# Altium PCB PCB1.PcbDoc
Units mm, origin at the board's own origin, x right, y up, seen from the top; angles counter-clockwise.
Board outline 85 x 55 mm, 2 copper layers (Top Layer, Bottom Layer); 4 components, 7 nets, 51 pads, 0 vias.
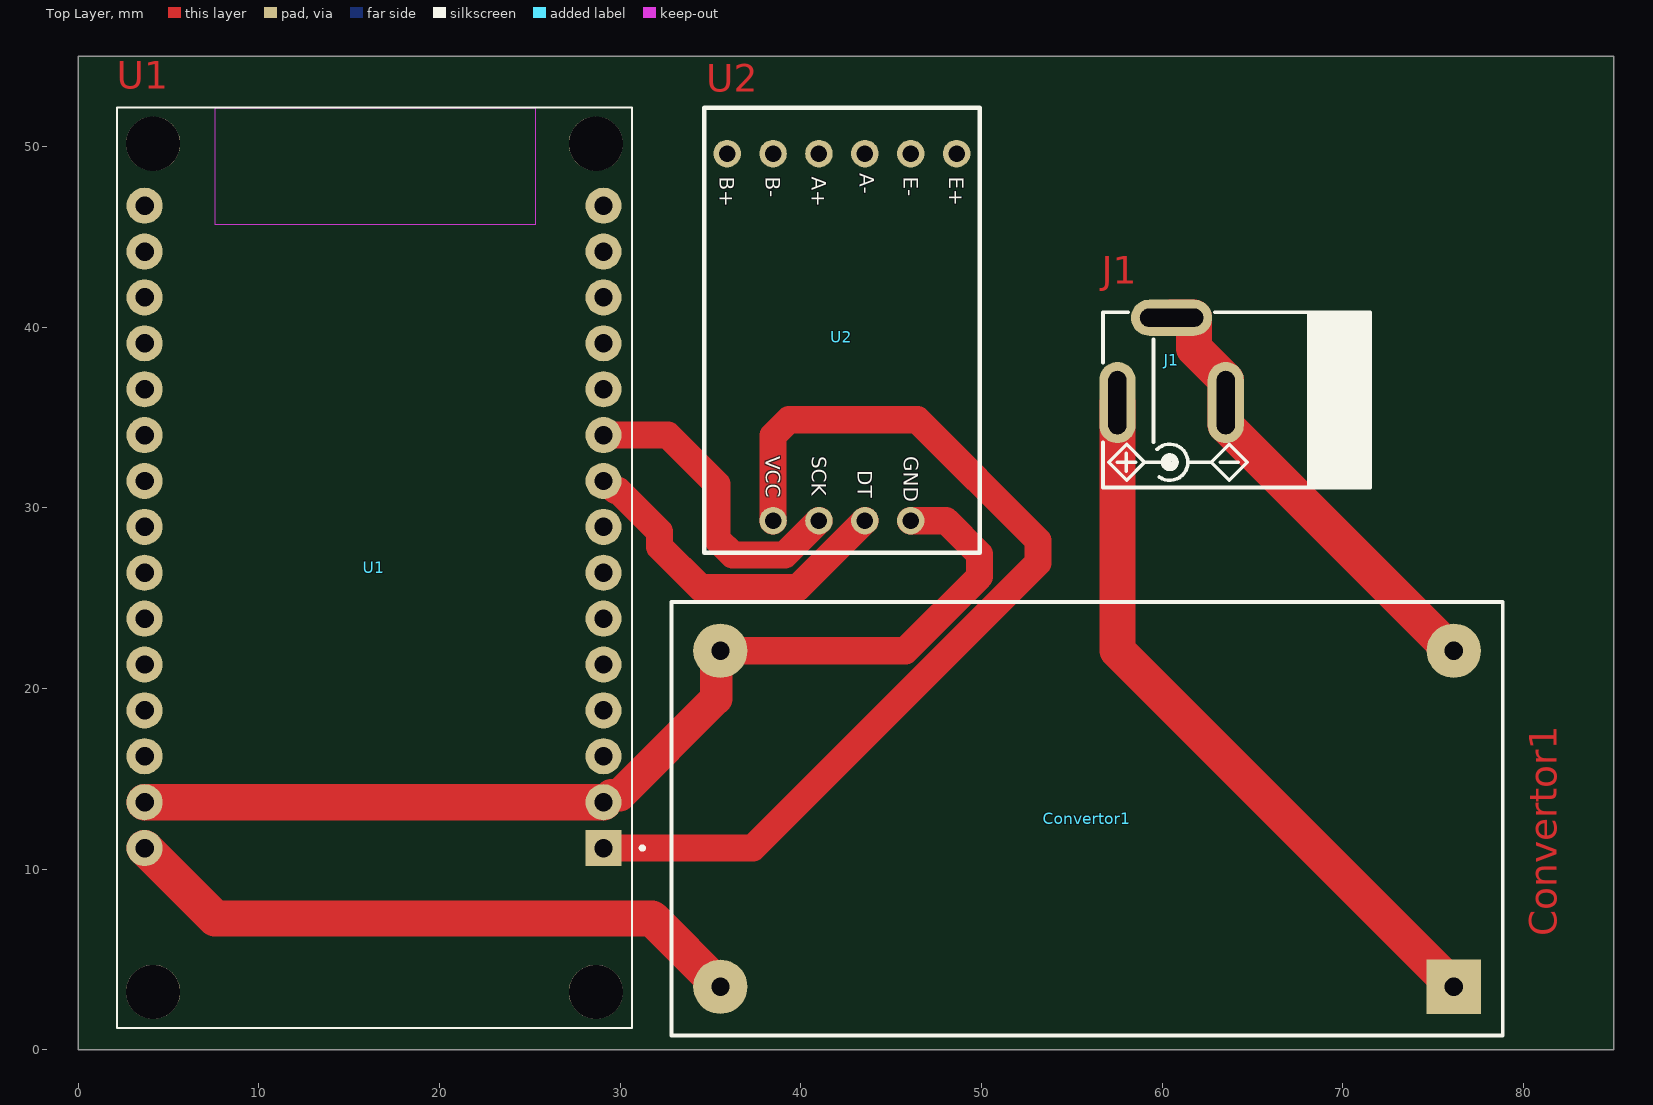
[diagram p0: Top Layer view]
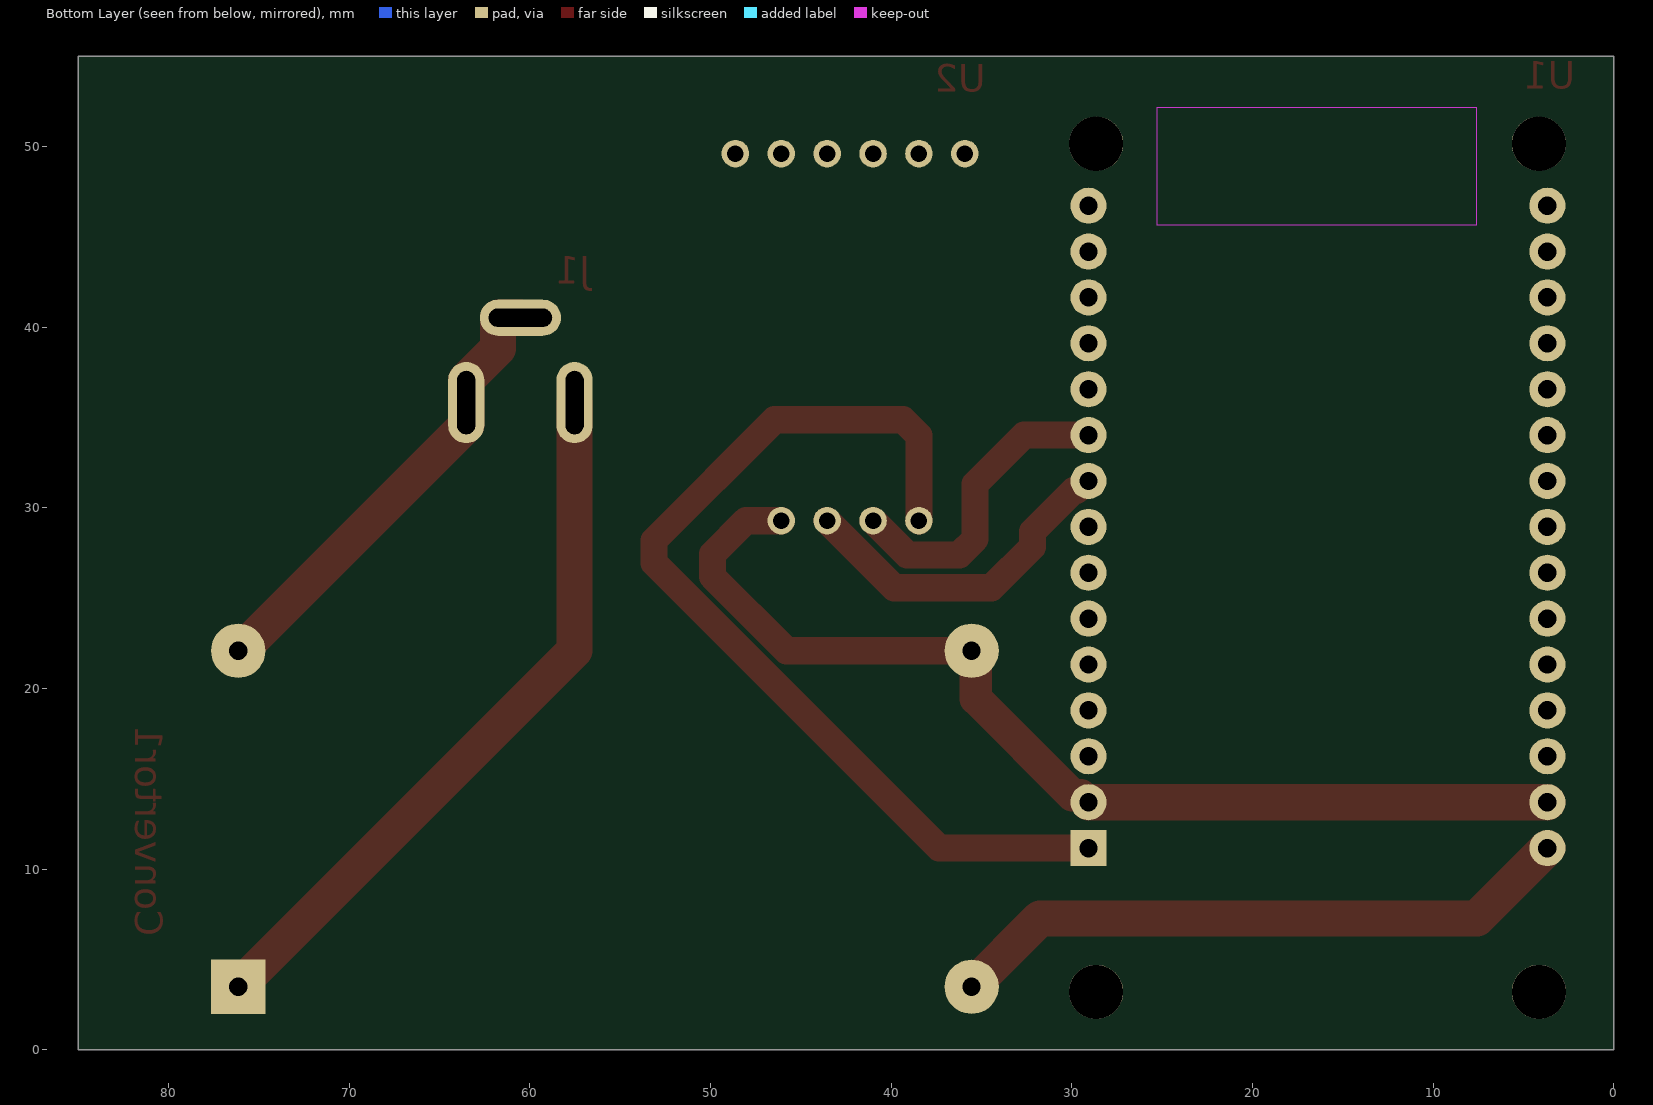
[diagram p1: Bottom Layer view, seen from below]

## Layer stack, top to bottom
Top Solder: solder mask 0.0102, Solder Resist, Dk 3.5
Top Layer: signal copper 0.0356
Dielectric 1: dielectric 0.32, FR-4, Dk 4.8
Bottom Layer: signal copper 0.0356
Bottom Solder: solder mask 0.0102, Solder Resist, Dk 3.5

## Board outline
0,0 85,0 85,55 0,55

## Design rules (kind name [scope] priority, off if disabled: settings)
Clearance [All] p1: gap=0.254 ignorepadtopadclearanceinfootprint=FALSE except(0: Arc-Hole Track-Hole SMDPad-Hole THPad-Hole Via-Hole Fill-Hole Poly-Hole Region-Hole Text-Hole)
PolygonConnect [All] p1: connectstyle=Relief reliefconductorwidth=0.254 reliefentries=4 polygonreliefangle="90 Angle" airgapwidth=0.254
RoutingVias [All] p1: holewidth=0.711 width=1.27 viastyle="Through Hole" minholewidth=0.711 minwidth=1.27 maxholewidth=0.711 maxwidth=1.27
SolderMaskExpansion [All] p1: expansion=0.102 istentingtop=FALSE
Width [All] p1: maxlimit=30 minlimit=0.254 preferedwidth=0.254 bottomlayer_maxwidth=0.254 minimp=50.000000 maximp=50.000000 favimp=50.000000
30 further rules are at their usual default settings.

## Components (designator, comment, footprint, x,y, rotation, side; value= is the part's Value field where it differs from the comment)
Convertor1 "LM2596 mdoule" "DC-DC LM2596" 77.843,1.79 r180 top
J1 "DC_POWER_JACK" JAC_PWR2 57.523,35.826 r270 top
U1 "ESP32-DEVKIT-V1" MODULE_ESP32_DEVKIT_V1 16.375,26.682 r180 top
U2 "HX711 module" HX711 43.299,39.89 r270 top

## Footprints (in the part's own frame and the unit in brackets; to place one, negate y for a bottom-side part, rotate by r counter-clockwise, add the part's x,y. Pads: shape width x height; smd on the part's side, far side on the other; paste and mask are expansions set on the pad)
"DC-DC LM2596" [mm]
  rect 3x3 hole 1: 1(1.7,-1.7)
  round 3 hole 1: 2(1.7,-20.3) 3(42.3,-1.7) 4(42.3,-20.3)
  silkscreen extent -1,-23 45,1
HX711 [mil]
  round 60 hole 36: 1(-382.62,209.66) 2(-382.62,109.66) 3(-382.62,9.66) 4(-382.62,-90.34) 5(-382.62,-190.34) 6(-382.62,-290.34) 7(417.38,-190.34) 8(417.38,-90.34) 9(417.38,9.66) 10(417.38,109.66)
  silkscreen extent -483,-340 487,260
JAC_PWR2 [mm] "DC POWER JACK, Power Jack KLDX-0202"
  oval 4.5x2 hole 1 slot 3.5 at 0 deg: 1(0,0) 2(0,6)
  oval 2x4.5 hole 1 slot 3.5 at 90 deg: 3(-4.7,3)
  silkscreen extent -5,-0.8 4.7,14, body extent -4.9,-0.65 4.5,13.85, height 10.8
MODULE_ESP32_DEVKIT_V1 [mm]
  rect 2x2 / inner round 2 / far side rect 2x2 hole 1.02: 1(-12.7,15.515)
  round 2 hole 1.02: 2(-12.7,12.975) 3(-12.7,10.435) 4(-12.7,7.895) 5(-12.7,5.355) 6(-12.7,2.815) 7(-12.7,0.275) 8(-12.7,-2.265) 9(-12.7,-4.805) 10(-12.7,-7.345) 11(-12.7,-9.885) 12(-12.7,-12.425) 13(-12.7,-14.965) 14(-12.7,-17.505) 15(-12.7,-20.045) 16(12.7,-20.045) 17(12.7,-17.505) 18(12.7,-14.965) 19(12.7,-12.425) 20(12.7,-9.885) 21(12.7,-7.345) 22(12.7,-4.805) 23(12.7,-2.265) 24(12.7,0.275) 25(12.7,2.815) 26(12.7,5.355) 27(12.7,7.895) 28(12.7,10.435) 29(12.7,12.975) 30(12.7,15.515)
  round 3 hole 3 unplated: ""(-12.28,23.475) ""(-12.28,-23.475) ""(12.23,23.475) ""(12.23,-23.475)
  Keep-Out Layer region: 8.78,-25.475 -8.91,-25.475 -8.91,-18.985 8.78,-18.985
  Keep-Out Layer region: 8.78,-25.475 -8.91,-25.475 -8.91,-18.985 8.78,-18.985
  silkscreen extent -14.95,-25.47 14.23,25.47

## Part data
Convertor1: library part "DC-DC LM2596", Current=3A, Voltage=12V
J1: library part CONN_PWR_JACKR2, "CONN, PWR JACK DC, PLUG DIAM 2.0MM RA THD", MANF="CUI STACK", MANF_P#="PJ-202A, PJ-002AH, PJ-102AH, KLDX-0202"
U1: "Dual core, Wi-Fi: 2.4 GHz up to 150 Mbits/s,BLE (Bluetooth Low Energy) and legacy Bluetooth, 32 bits, Up to 240 MHz", Package=None, Availability="Not in stock", Check_prices=https://www.snapeda.com/parts/ESP32-DEVKIT-V1/Do+it/view-part/?ref=eda, MF="Do it", MP=ESP32-DEVKIT-V1, Price=None, SnapEDA_Link=https://www.snapeda.com/parts/ESP32-DEVKIT-V1/Do+it/view-part/?ref=snap
U2: library part HX711

## Nets (pads, with @x,y where several pads share a name; then routed paths per layer and width w, separated by ;. In a path a pad name is that pad's centre, name@x,y a point inside that pad or via, vN(x,y) a via of type N, cw(c..) or ccw(c..) an arc to the next point about the centre after c; other vN are vias at no path point)
3.3V: U1.1 U2.7 | length 54.3
  Top Layer w1.5: U1.1 37.342,11.167 53.129,26.954 53.129,28.196 46.45,34.875 39.343,34.875 38.464,33.996 U2.7
5V0: Convertor1.3 U1.30 | length 35.2
  Top Layer w0.8: U1.30 U1.30@3.833,11.167
  Top Layer w2: U1.30 7.567,7.275 31.758,7.275 Convertor1.3
D9: U1.9 U2.9 | length 18.9
  Top Layer w1.5: U1.9 29.21,31.487 29.746,30.951 29.905,30.951 32.179,28.677 32.179,27.849 34.454,25.575 39.831,25.575 U2.9
D10: U1.10 U2.8 | length 17.2
  Top Layer w1.5: U1.10 32.648,34.027 35.35,31.325 35.35,28.279 36.229,27.4 39.109,27.4 40.998,29.288 U2.8
GND: Convertor1.4 U1.2 U1.29 U2.10 | length 58.6
  Top Layer w1.5: Convertor1.4 45.784,22.09 49.888,26.194 49.888,27.437 48.041,29.284 46.089,29.284 U2.10
  Top Layer w1.8: U1.2 29.129,13.707 29.515,14.093 29.967,14.093 35.313,19.439 35.313,21.86 Convertor1.4
  Top Layer w2: U1.29 U1.2
NetConvertor1_1: Convertor1.1 J1.1 | length 40
  Top Layer w2: J1.1 57.523,22.11 Convertor1.1
NetConvertor1_2: Convertor1.2 J1.2 J1.3 | length 25.7
  Top Layer w2: J1.3 61.773,40.526 61.773,38.826 63.523,37.076 J1.2 63.523,34.576 76.009,22.09 Convertor1.2
pads on no net: U1. U1.3 U1.4 U1.5 U1.6 U1.7 U1.8 U1.11 U1.12 U1.13 U1.14 U1.15 U1.16 U1.17 U1.18 U1.19 U1.20 U1.21 U1.22 U1.23 U1.24 U1.25 U1.26 U1.27 U1.28 U2.1 U2.2 U2.3 U2.4 U2.5 U2.6

## Text inside footprints (layer, text, board x,y; h text height)
U2: Top Overlay "VCC" at 38.064,32.845 h0.8 r270; Top Overlay "SCK" at 40.604,32.845 h0.8 r270; Top Overlay "DT" at 43.144,32.083 h0.8 r270; Top Overlay "GND" at 45.684,32.845 h0.8 r270; Top Overlay "B+" at 35.524,48.339 h0.8 r270; Top Overlay "B-" at 38.064,48.339 h0.8 r270; Top Overlay "A+" at 40.604,48.339 h0.8 r270; Top Overlay "A-" at 43.25,48.532 h0.8 r269.96; Top Overlay "E-" at 45.684,48.339 h0.8 r270; Top Overlay "E+" at 48.224,48.339 h0.8 r270